# Altium PCB PCB1.PcbDoc
Units mil, origin at the board's own origin, x right, y up, seen from the top; angles counter-clockwise.
Board outline 1735 x 2304 mil, 2 copper layers (Top Layer, Bottom Layer); 26 components, 35 nets, 102 pads, 18 vias.
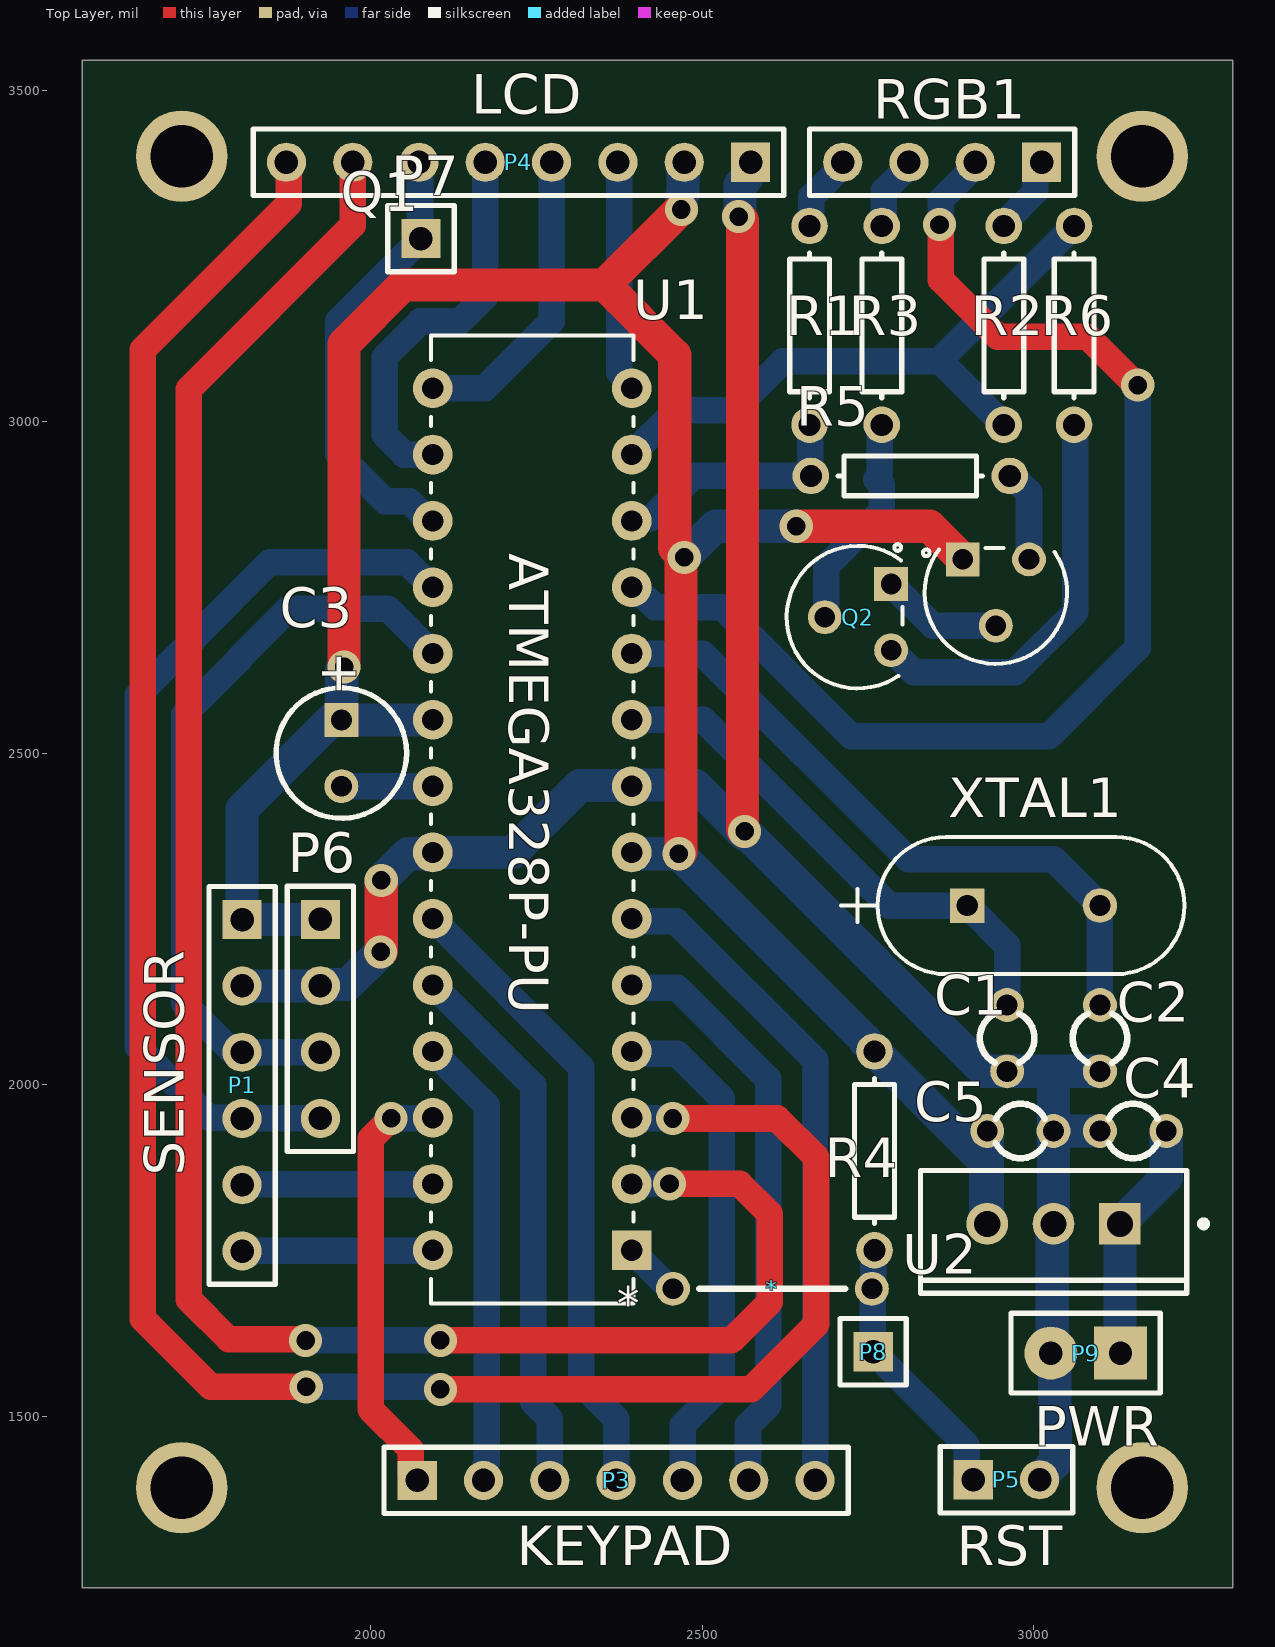
[diagram p0: Top Layer view]
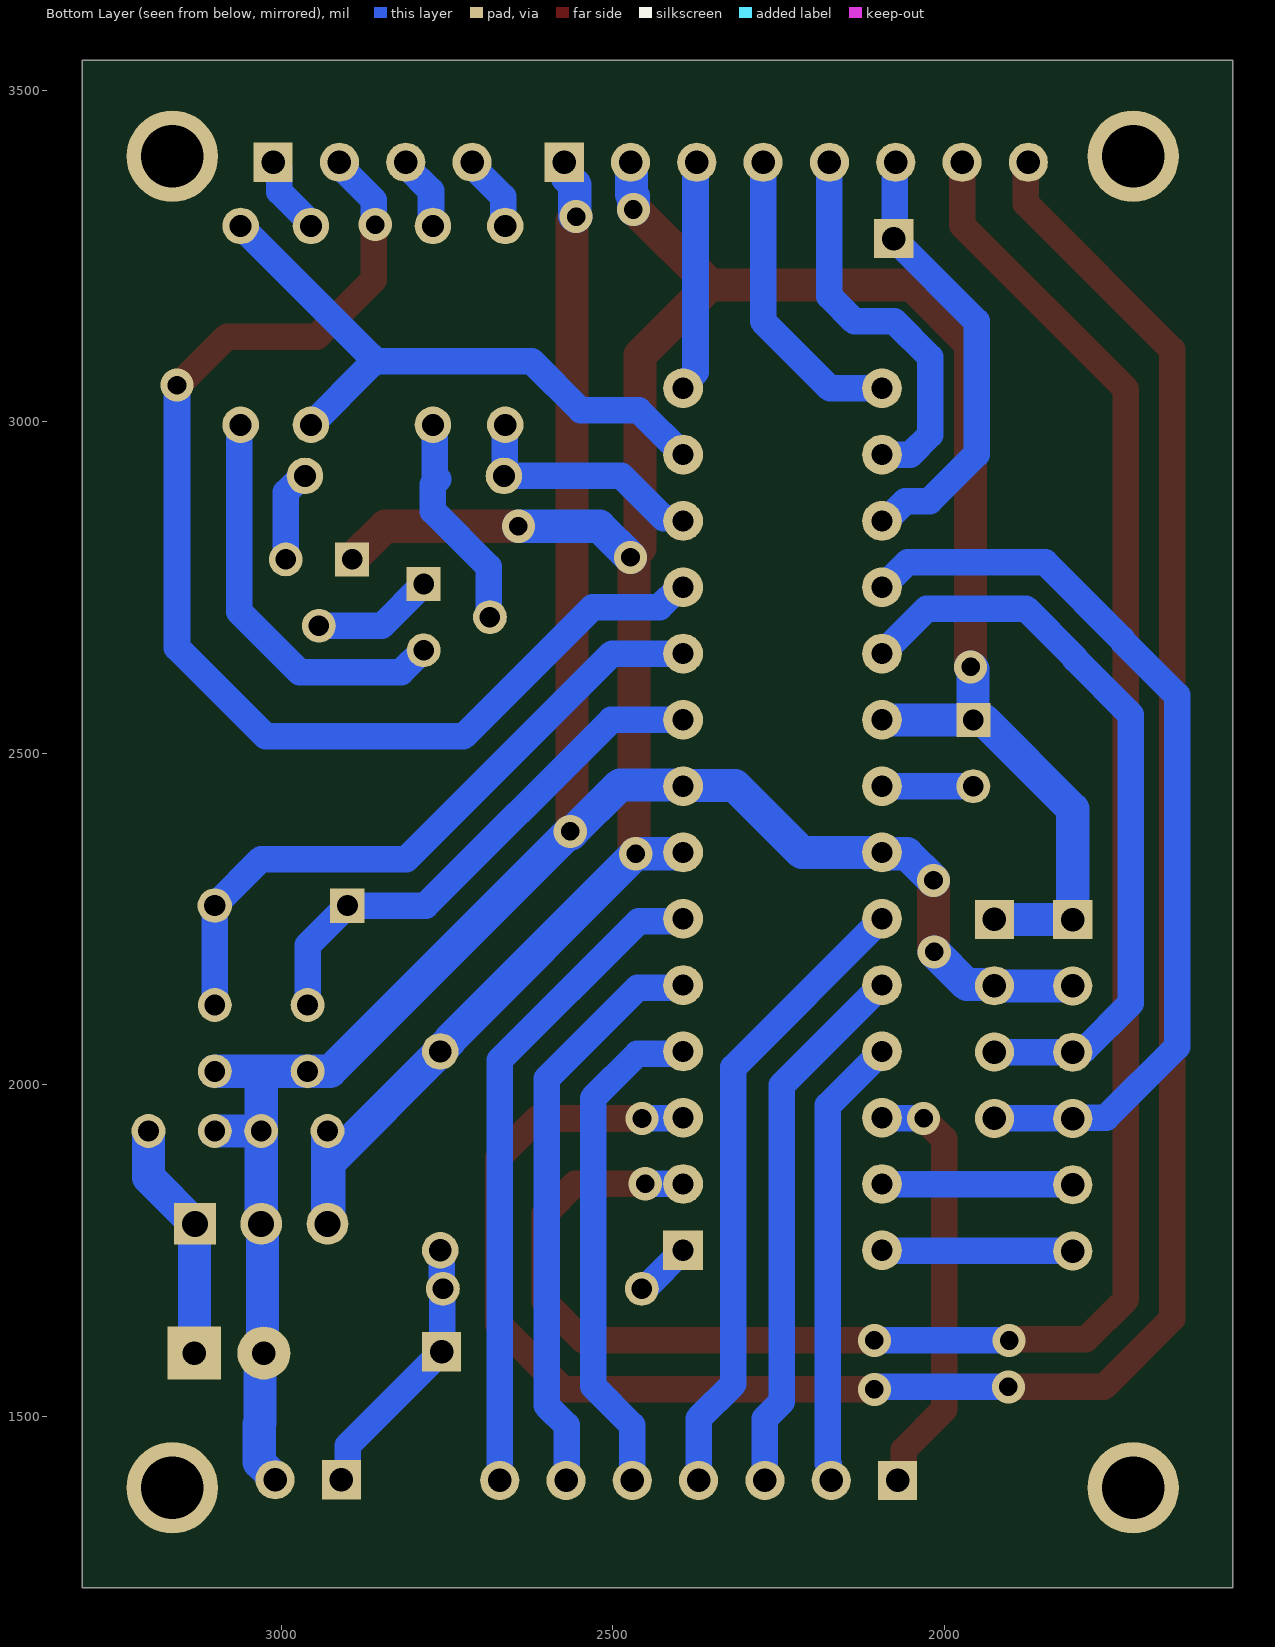
[diagram p1: Bottom Layer view, seen from below]
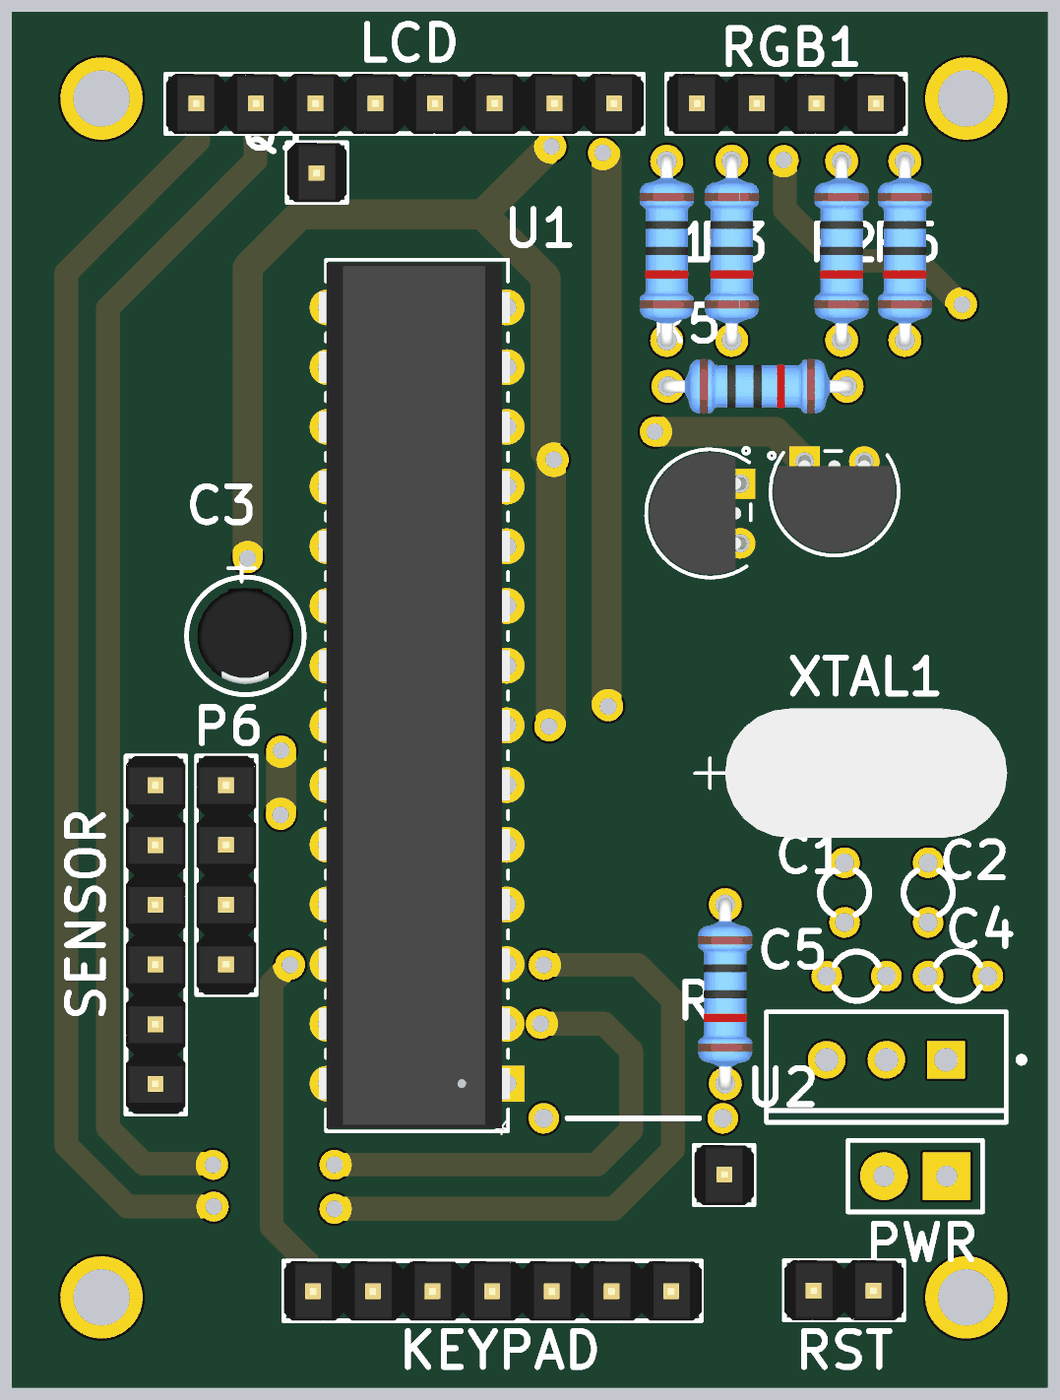
[diagram p2: 3D render of the assembled board from above, using the file's embedded part models]

## Layer stack, top to bottom
Top Solder: solder mask 0.4, Solder Resist, Dk 3.5
Top Layer: signal copper 1.4
Dielectric 1: dielectric 12.6, FR-4, Dk 4.8
Bottom Layer: signal copper 1.4
Bottom Solder: solder mask 0.4, Solder Resist, Dk 3.5

## Board outline
1565,1241 3300,1241 3300,3545 1565,3545

## Design rules (kind name [scope] priority, off if disabled: settings)
Clearance [All] p1: gap=10 ignorepadtopadclearanceinfootprint=FALSE except(0: Arc-Hole Track-Hole SMDPad-Hole THPad-Hole Via-Hole Fill-Hole Poly-Hole Region-Hole Text-Hole; 30: Arc-Arc Arc-Track Arc-Fill Arc-Poly Arc-Region Track-Track Track-Fill Track-Poly Track-Region)
PolygonConnect [All] p1: connectstyle=Relief reliefconductorwidth=10 reliefentries=4 polygonreliefangle="90 Angle" airgapwidth=10
RoutingVias [All] p1: holewidth=28 width=50 viastyle="Through Hole" minholewidth=28 minwidth=50 maxholewidth=28 maxwidth=50
SolderMaskExpansion [All] p1: expansion=4 istentingtop=FALSE
Width Width_POW [InNet('+5')  or InNet('GND') or InNet('VS+')] p1: maxlimit=60 minlimit=30 preferedwidth=50 minimp=50.000000 maximp=50.000000 favimp=50.000000
Width [All] p2: maxlimit=60 minlimit=30 preferedwidth=40 minimp=50.000000 maximp=50.000000 favimp=50.000000
30 further rules are at their usual default settings.

## Components (designator, comment, footprint, x,y, rotation, side; value= is the part's Value field where it differs from the comment)
* "Jumper3" JUMPER3 2606,1692 r180 top
C1 "100pF" CAP3 2960,2070 r270 top
C2 "100pF" CAP3 3100,2070 r270 top
C3 "100pF" CAP1 1956,2500 r270 top
C4 "100pF" CAP3 3150,1930 r180 top
C5 "100pF" CAP3 2980,1930 r0 top
P1 "SENSOR" H6 1806.1,2248.82 r270 top
P3 "KEYPAD" H7 2070.28,1402.91 r0 top
P4 "LCD" H8 2573,3391 r180 top
P5 "RST" H2 2909,1404 r0 top
P6 "ISP1" H4 1924.21,2249.02 r270 top
P7 "ISP2" H1 2076,3276 r0 top
P8 "ISP3" H1 2758,1597 r180 top
P9 "PWR" H2_PWR 3131,1595 r180 top
Q1 "A733" TO-92_ONS 2993,2792 r180 top
Q2 "A733" TO-92_ONS 2785,2655 r90 top
R1 "300R" RES 2662,3145 r90 top
R2 "100R" RES 2955,3145 r90 top
R3 "470R" RES 2771,3145 r90 top
R4 "10K" RES 2760,1900 r90 top value=10k
R5 "100k" RES 2814,2918 r180 top
R6 "100k" RES 3061,3145 r90 top
RGB1 "RGB" H4 3012,3391 r180 top
U1 "ATMEGA328P-PU" 28P3_ATM 2393.74,1750.08 r180 top
U2 "LM7805CT" FAIR-TO-220-3 3030,1790 r270 top
XTAL1 "9B-11.0592MAAJ-B" XTAL 2900,2270 r0 top

## Footprints (in the part's own frame and the unit in brackets; to place one, negate y for a bottom-side part, rotate by r counter-clockwise, add the part's x,y. Pads: shape width x height; smd on the part's side, far side on the other; paste and mask are expansions set on the pad)
28P3_ATM [mil]
  rect 60x60 hole 32 mask+0: 1(0,0)
  round 60 hole 32 mask+0: 2(0,-100) 3(0,-200) 4(0,-300) 5(0,-400) 6(0,-500) 7(0,-600) 8(0,-700) 9(0,-800) 10(0,-900) 11(0,-1000) 12(0,-1100) 13(0,-1200) 14(0,-1300) 15(300,-1300) 16(300,-1200) 17(300,-1100) 18(300,-1000) 19(300,-900) 20(300,-800) 21(300,-700) 22(300,-600) 23(300,-500) 24(300,-400) 25(300,-300) 26(300,-200) 27(300,-100) 28(300,0)
  silkscreen extent -3,-1380 303,80, body extent -5,-1375 314,75, height 205
CAP1 [mm] "THD, 2-Leads, Dia 5mm, Body Length 11mm"
  rect 1.3x1.3 hole 0.8: 1(-1.27,0)
  round 1.3 hole 0.8: 2(1.27,0)
  silkscreen extent -2.5,-2.5 2.5,2.5, body extent -2.05,-2.05 2.05,2.05, height 8.1
CAP3 [mm] "THD, 2-Leads"
  round 1.3 hole 0.8: 1(-1.27,0) 2(1.27,0)
  silkscreen extent -0.94,-1.04 0.94,1.04
FAIR-TO-220-3 [mm] "FM, 3-Leads, Body 10.2x4.7mm, Pitch 2.54mm"
  rect 1.6x1.6 hole 1: 1(0,2.54)
  round 1.6 hole 1: 2(0,0) 3(0,-2.54)
  silkscreen extent -2.04,-5.1 2.66,5.88, body extent -2.04,-5.1 2.66,5.1, height 18.95
H1 [mm] "Connector; Header; 1 Position"
  rect 1.5x1.5 hole 0.9: 1(0,0)
  silkscreen extent -1.27,-1.27 1.27,1.27, body extent -1.27,-1.27 1.27,1.27, height 9.2
H2 [mm] "Connector; Header; 2 Position"
  rect 1.5x1.5 hole 0.9: 1(0,0)
  round 1.5 hole 0.9: 2(2.54,0)
  silkscreen extent -1.27,-1.27 3.81,1.27, body extent -1.27,-1.27 3.81,1.27, height 9.2
H2_PWR [mil] "Connector; Header; 2 Position"
  rect 80x80 hole 35.43: 1(0,0)
  round 80 hole 35.43: 2(105,0)
  silkscreen extent -60,-60 165,60
H4 [mm] "Connector; Header; 4 Position"
  rect 1.5x1.5 hole 0.9: 1(0,0)
  round 1.5 hole 0.9: 2(2.54,0) 3(5.08,0) 4(7.62,0)
  silkscreen extent -1.27,-1.27 8.89,1.27, body extent -1.27,-1.27 8.89,1.27, height 9.2
H6 [mm] "Connector; Header; 6 Position"
  rect 1.5x1.5 hole 0.9: 1(0,0)
  round 1.5 hole 0.9: 2(2.54,0) 3(5.08,0) 4(7.62,0) 5(10.16,0) 6(12.7,0)
  silkscreen extent -1.27,-1.27 13.97,1.27, body extent -1.27,-1.27 13.97,1.27, height 9.2
H7 [mm] "Connector; Header; 7 Position"
  rect 1.5x1.5 hole 0.9: 1(0,0)
  round 1.5 hole 0.9: 2(2.54,0) 3(5.08,0) 4(7.62,0) 5(10.16,0) 6(12.7,0) 7(15.24,0)
  silkscreen extent -1.27,-1.27 16.51,1.27, body extent -1.27,-1.27 16.51,1.27, height 9.2
H8 [mm] "Connector; Header; 8 Position"
  rect 1.5x1.5 hole 0.9: 1(0,0)
  round 1.5 hole 0.9: 2(2.54,0) 3(5.08,0) 4(7.62,0) 5(10.16,0) 6(12.7,0) 7(15.24,0) 8(17.78,0)
  silkscreen extent -1.27,-1.27 19.05,1.27, body extent -1.27,-1.27 19.05,1.27, height 9.2
JUMPER3 [mm]
  round 1.3 hole 0.8: 1(-3.81,0) 2(3.81,0)
  silkscreen extent -2.79,0 2.79,0
RES [mm] "Axial Device, Thru-Hole; 2 Leads; 0.3 in Pin Spacing"
  round 1.4 hole 0.85: 1(-3.81,0) 2(3.81,0)
  silkscreen extent -2.77,-0.76 2.77,0.76, body extent -4.08,-1.17 4.08,1.17, height 2.44
TO-92_ONS [mil]
  rect 51x51 hole 31 mask+0: 1(100,0)
  round 51 hole 31 mask+0: 2(50,100) 3(0,0)
  silkscreen extent -57,-17 160,157, body extent -52,-11 152,153, height 300
XTAL [mil] "Connector; Header; 1 Position"
  rect 52x52 hole 32 mask+0: 1(0,0)
  round 52 hole 32 mask+0: 2(200,0)
  silkscreen extent -190,-104 328,104, body extent -140,-108 332,108, height 145

## Part data
C1 C2 C3 C4 C5: library part Cap1, "Capacitor", PackageDescription="Capacitor; 2 Leads", PackageReference=CAPR5-4X5, Published=23-Sep-2002, Publisher="Altium Limited"
P1: library part "Header 6", "Header, 6-Pin", LatestRevisionDate=17-Jul-2002, LatestRevisionNote="Re-released for DXP Platform.", Publisher="Altium Limited"
P3: library part "Header 7", "Header, 7-Pin", LatestRevisionDate=17-Jul-2002, LatestRevisionNote="Re-released for DXP Platform.", Publisher="Altium Limited"
P4: library part "Header 8", "Header, 8-Pin", LatestRevisionDate=17-Jul-2002, LatestRevisionNote="Re-released for DXP Platform.", Publisher="Altium Limited"
P5 P9: library part "Header 2", "Header, 2-Pin", LatestRevisionDate=17-Jul-2002, LatestRevisionNote="Re-released for DXP Platform.", Publisher="Altium Limited"
P6: library part "Header 4", "Header, 4-Pin", LatestRevisionDate=17-Jul-2002, LatestRevisionNote="Re-released for DXP Platform.", Publisher="Altium Limited"
P7 P8: library part "Header 1", "Header, 1-Pin", LatestRevisionDate=17-Jul-2002, LatestRevisionNote="Re-released for DXP Platform.", Publisher="Altium Limited"
Q1 Q2: "PNP General Purpose Transistor", ComponentLink1Description="Manufacturer Link", ComponentLink1URL=http://www.fairchildsemi.com/, ComponentLink2Description=Datasheet, ComponentLink2URL=http://www.fairchildsemi.com/ds/2N%2F2N3906.pdf, DatasheetVersion=1997, LatestRevisionDate=15-Jan-2003, LatestRevisionNote="PCB Footprint 'BCY-W3/D4.7' replaced", PackageDescription="TO, Flat Index; 3 In-Line, Axial Leads; Body Dia. 4.5mm; Leads 0.51 x 0.48 mm (max)", PackageReference=TO-92A, PackageVersion=Sep-1998, Published=8-Jun-2000, Publisher="Altium Limited"
R1 R2 R3 R4 R5 R6: library part Res1, "Resistor", LatestRevisionDate=17-Jul-2002, LatestRevisionNote="Re-released for DXP Platform.", PackageDescription="Axial Device, Thru-Hole; 2 Leads; 0.3 in Pin Spacing", PackageReference=AXIAL-0.3, Published=8-Jun-2000, Publisher="Altium Limited"
U1 XTAL1: "No Description Available", Copyright="Copyright (C) 2018 Accelerated Designs. All rights reserved", RefDes=RefDes, Type=DEV
  U1: Built_By=EMA_UL_Team, Manufacturer_Part_Number=ATMEGA328P-PU, SourceLibrary=Atmel_2011-04-02, Vendor=Atmel
  XTAL1: Built_By=EMA_Cory, Datasheet=http://www.txccrystal.com/images/pdf/9b.pdf, Manufacturer_Part_Number=9B-11.0592MAAJ-B, SourceLibrary=TXC_2020-02-10, Vendor=TXC
U2: library part CMP-2000-04938-1, "Positive Voltage Regulator, 5 V, 1 A, -40 to 125 degC, 3-Pin TO-220, RoHS, Tube", Manufacturer=FairchildSemiconductor, Maximum Input Voltage=35V, Maximum Output Current=2.2(Typ)A, Maximum Quiescent Current=8mA, Operating Temperature=-40to125degC, Output Voltage=5V, Package=3TO-220AB, Package Description="3-Pin Through Hole Device, Body 10 x 4.5 mm, Pitch 2.54 mm", Package Reference=TO-220, Typical Dropout Voltage @ Current=2@1AV, Accuracy=±4%, Category=LinearRegulator, Datasheet URL=https://datasheet.ciiva.com/26904/lm7805ct-26904988.pdf, Datasheet Version=Aug-12, Line Regulation=100mV, Load Regulation=100mV, Manufacturer URL=https://www.fairchildsemi.com/, Mounting=ThroughHole, Number of Outputs=1, Output Type=Fixed, Package URL=https://www.fairchildsemi.com/package-drawings/TO/TO220B03.pdf, Packaging=Rail/Tube, Polarity=Positive, Rad Hard=No, Type=Linear

## Free pads (board coordinates)
  round 137.8 hole 94.49: ""(1715,1392) ""(1715,3400) ""(3164,1392) ""(3164,3400)

## Via types
v1: diameter 50, hole 28, Top Layer to Bottom Layer, 18 vias

## Nets (pads, with @x,y where several pads share a name; then routed paths per layer and width w, separated by ;. In a path a pad name is that pad's centre, name@x,y a point inside that pad or via, vN(x,y) a via of type N, cw(c..) or ccw(c..) an arc to the next point about the centre after c; other vN are vias at no path point)
+5: C3.1 C5.1 P1.1 P4.2 P6.1 Q1.1 R4.2 U1.7 U1.20 U2.3 | length 4196.8
  Top Layer w50: v1(1960,2630) 1960,3117 2049,3206 2353,3206 ; v1(2464.99,2348.17) 2468,2351.18 2468,2790.08 v1(2473,2795.08) 2458.74,2809.34 2458.74,3100.26 2353,3206 ; v1(2468.74,3319.74) 2466.74,3319.74 2353,3206 ; v1(2642,2842) 2843,2842 Q1.1
  Bottom Layer w50: P6.1 1924.11,2248.92 1806.2,2248.92 P1.1 1806.1,2415.39 1941.3,2550.59 1955.41,2550.59 C3.1 C3.1 ; v1(1960,2630) 1956.59,2626.59 1956.59,2550.59 C3.1 ; U1.20 2093.7,2550.04 C3.1 ; U1.7 2395.65,2348.17 v1(2464.99,2348.17) 2745.28,2067.88 2745.28,2066.11 2760,2051.39 R4.2 2927.51,1882.49 2927.51,1792.49 U2.3 C5.1 ; v1(2468.74,3319.74) 2468.74,3339.74 2471.27,3342.27 2471.27,3389.27 P4.2 ; v1(2473,2795.08) 2519.92,2842 v1(2642,2842)
GND: C1.2 C2.2 C4.2 C5.2 P1.2 P4.1 P5.2 P6.2 P9.2 U1.8 U1.22 U2.2 | length 3383.6
  Top Layer w50: P1.2 P1.2@1807.83,2150.55 ; P6.2 P6.2@1924.86,2148.37 ; v1(2015,2200) 2016,2201 v1(2016,2308) ; v1(2555,3309) 2561,3303 2561,2384.87 v1(2563.98,2381.89)
  Bottom Layer w50: P1.2 1806.2,2148.92 1924.11,2148.92 P6.2 1925.95,2150.75 1965.75,2150.75 v1(2015,2200) ; v1(2016,2308) 2056.17,2348.17 2091.83,2348.17 U1.22 2214.57,2350.08 2315.49,2451 2392.82,2451 U1.8 ; U1.8@2395.65,2451.99 2488.95,2451.99 2492.67,2448.28 v1@2559.06,2381.89 ; v1(2555,3309) 2557,3311 2557,3357.18 2568.47,3368.66 2568.47,3386.47 P4.1 ; v1@2563.98,2376.97 v1(2563.98,2381.89) 2925.87,2020 C1.2 3030,2020 ; P5.2 3009,1406.45 3033,1430.45 3033,1488.53 3031.74,1489.79 3031.74,1589.26 P9.2 3028,1597 3028,1788 U2.2 C5.2 ; C4.2@3099.77,1930.23 C4.2 C5.2 ; C2.2 3030,2020 ; C5.2 3030,2020
Net*_1: *.1 P5.1 P8.1 R4.1 | length 411
  Bottom Layer w40: R4.1 2758,1748 2758,1694 *.1 2757,1691 2757,1598 P8.1 2899.47,1455.53 2899.47,1413.53 P5.1
Net*_2: *.2 U1.1 | length 86.3
  Bottom Layer w40: U1.1 2449.68,1694.14 2453.86,1694.14 *.2
NetC1_1: C1.1 U1.9 XTAL1.1 | length 797.1
  Bottom Layer w40: U1.9 2501.85,2550.08 2781.93,2270 XTAL1.1 2960,2210 C1.1
NetC2_1: C2.1 U1.10 XTAL1.2 | length 1013.7
  Bottom Layer w40: U1.10 2500.85,2650.08 2810.93,2340 3030,2340 XTAL1.2 C2.1
NetC3_2: C3.2 U1.21 | length 137.8
  Bottom Layer w40: C3.2 C3.2 2093.7,2450.04 U1.21
NetP1_3: P1.3 P6.3 U1.19 | length 1150.9
  Top Layer w40: P1.3 P1.3@1806.2,2048.92 ; P6.3@1915.41,2048.92 1915.51,2049.02 P6.3
  Bottom Layer w40: P6.3 1924.11,2048.92 1806.2,2048.92 P1.3 1802.46,2052.46 1788.68,2052.46 1718.62,2122.53 1718.62,2557.96 1802.28,2641.62 1802.28,2643.25 1876.75,2717.72 2026.1,2717.72 U1.19
NetP1_4: P1.4 P6.4 U1.18 | length 1404.2
  Top Layer w40: P1.4 P1.4@1806.2,1948.92 ; P6.4@1915.41,1948.92 1915.51,1949.02 P6.4
  Bottom Layer w40: P6.4 1924.11,1948.92 1806.2,1948.92 P1.4 1804.83,1950.09 1755.61,1950.09 1648.62,2057.09 1648.62,2586.95 1732.28,2670.61 1732.28,2672.24 1847.76,2787.72 2055.1,2787.72 2092.74,2750.08 U1.18
NetP1_5: P1.5 U1.27 | length 288.2
  Bottom Layer w40: P1.5 1806.73,1849.45 2084.5,1849.45 2085.13,1850.08 U1.27
NetP1_6: P1.6 U1.28 | length 288.2
  Bottom Layer w40: P1.6 1806.73,1749.45 2084.5,1749.45 2085.13,1750.08 U1.28
NetP3_1: P3.1 U1.26 | length 651.2
  Top Layer w40: v1(2031,1949) 2000,1918 2000,1510 2060.75,1449.25 2060.75,1412.44 P3.1
  Bottom Layer w40: v1(2031,1949) 2031.54,1949.54 2093.2,1949.54 U1.26
NetP3_2: P3.2 U1.25 | length 682.9
  Bottom Layer w40: U1.25 2175.2,1968.62 2175.2,1428.44 2173.92,1427.17 2173.92,1406.56 P3.2
NetP3_3: P3.3 U1.24 | length 820.3
  Bottom Layer w40: U1.24 2245.2,1998.62 2245.2,1521.38 2270.28,1496.3 P3.3
NetP3_4: P3.4 U1.23 | length 961.7
  Bottom Layer w40: U1.23 2317.91,2025.91 2317.91,1548.66 2370.28,1496.3 P3.4
NetP3_5: P3.5 U1.4 | length 766.2
  Bottom Layer w40: U1.4 2397.57,2046.25 2462.85,2046.25 2529.53,1979.57 2529.53,1545.28 2470.47,1486.22 2470.47,1403.11 P3.5
NetP3_6: P3.6 U1.5 | length 883.1
  Bottom Layer w40: U1.5 2397.57,2146.25 2461.84,2146.25 2599.53,2008.56 2599.53,1516.28 2569.18,1485.94 2569.18,1404.01 P3.6
NetP3_7: P3.7 U1.6 | length 998.8
  Bottom Layer w40: U1.6 2397.57,2246.25 2460.84,2246.25 2670.28,2036.81 P3.7
NetP4_3: P4.3 U1.14 | length 349.5
  Bottom Layer w40: P4.3 2375,3389 2375,3074.23 2393.74,3055.49 U1.14
NetP4_4: P4.4 U1.15 | length 461.1
  Bottom Layer w40: U1.15 2172.08,3050.08 2273,3151 P4.4
NetP4_5: P4.5 U1.16 | length 594.2
  Bottom Layer w40: U1.16 2050.92,2950.08 2021,2980 2021,3097 2075,3151 2135,3151 2173,3189 P4.5
NetP4_6: P4.6 P7.1 U1.17 | length 677.6
  Bottom Layer w40: P4.6 2074.5,3389.5 2074.5,3277.5 P7.1 1951,3151 1951,2951.01 2021.93,2880.08 2058.33,2880.08 2088.33,2850.08 U1.17
NetP4_7: P4.7 U1.2 | length 3103.5
  Top Layer w40: v1(1902,1614) 1900.09,1615.91 1786.09,1615.91 1726,1676 1726,3049 1973,3296 P4.7 ; v1(2105.2,1614.17) 2544.29,1614.17 2602.24,1672.13 2602.24,1804.81 2556.66,1850.39 v1(2450.79,1850.39)
  Bottom Layer w40: v1(1902,1614) 1902.09,1614.09 2105.11,1614.09 v1(2105.2,1614.17) ; U1.2 2393.9,1850.24 2450.63,1850.24 v1(2450.79,1850.39)
NetP4_8: P4.8 U1.3 | length 3492.6
  Top Layer w40: P4.8 1876.65,3387.35 1876.65,3328.65 1656,3108 1656,1647.01 1759.01,1544 v1(1903,1544) ; v1(2105.2,1540.35) 2573.82,1540.35 2672.24,1638.78 2672.24,1889.76 2613.19,1948.82 v1(2455.71,1948.82)
  Bottom Layer w40: v1(1903,1544) 2098.85,1544 2102.49,1540.35 v1(2105.2,1540.35) ; U1.3 2394.37,1949.45 2455.08,1949.45 v1(2455.71,1948.82)
NetQ1_2: Q1.2 Q2.1 | length 184.1
  Bottom Layer w40: Q2.1 2848,2692 Q1.2
NetQ1_3: Q1.3 R5.1 | length 140.6
  Bottom Layer w40: R5.1@2964.11,2917.89 R5.1 2968.09,2918 2993,2893.09 Q1.3
NetQ2_2: Q2.2 R3.1 | length 332.3
  Bottom Layer w40: Q2.2 2687.1,2707.1 2687.1,2781.04 2771,2864.93 2771,2904.93 2762.89,2913.04 2768.11,2918.26 2768.11,2992.11 R3.1
NetQ2_3: Q2.3 R6.1 | length 612.2
  Bottom Layer w40: Q2.3 2786.01,2655 2819.01,2622 2971.99,2622 3063,2713.01 3063,2993 R6.1
NetR1_1: R1.1 R5.2 U1.12 | length 381.6
  Bottom Layer w40: U1.12@2399.15,2850.08 U1.12 2397.57,2853.91 2422.76,2853.91 2486.86,2918 R5.2 2663,2919 2663,2994 R1.1
NetR1_2: R1.2 RGB1.4 | length 126
  Bottom Layer w40: R1.2@2662,3299.09 R1.2 2664.89,3297.89 2664.89,3338.74 2712,3385.84 RGB1.4 RGB1.4@2708.35,3387.35
NetR2_1: R2.1 R6.2 U1.13 | length 947.9
  Bottom Layer w40: U1.13 2460.66,3017 2548.07,3017 2621.63,3090.57 2865,3090.57 ; R2.1 2865,3085 2865,3090.57 ; R6.2 2865,3099 2865,3090.57
NetR2_2: R2.2 RGB1.1 | length 119.6
  Bottom Layer w40: R2.2 2955,3299.09 3002.47,3346.56 3002.47,3381.47 RGB1.1
NetR3_2: R3.2 RGB1.3 | length 113
  Bottom Layer w40: R3.2 2773.89,3297.89 2773.89,3347.74 2812,3385.84 RGB1.3
NetRGB1_2: RGB1.2 U1.11 | length 1871.1
  Top Layer w40: v1(2858,3297) 2859.91,3295.09 2859.91,3214.09 2946,3128 3081.51,3128 3154.51,3055 v1(3157,3055)
  Bottom Layer w40: U1.11 2399.15,2750.08 2429.15,2720.08 2529.84,2720.08 2724.92,2525 3023,2525 3157,2659 v1(3157,3055) ; v1(2858,3297) 2859.91,3298.91 2859.91,3333.76 2912,3385.84 RGB1.2
VS+: C4.1 P9.1 U2.1 | length 364.4
  Bottom Layer w50: P9.1 3130.5,1595.5 3130.5,1789.5 U2.1 3200,1860 C4.1

## Text inside footprints (layer, text, board x,y; h text height)
C3: Top Overlay "+" at 1926.98,2653.86 h59.06 r270
Q1: Mechanical 7 "0.165in/4.191mm" at 3303,2754.5 h25 r180; Mechanical 7 "0.1in/2.54mm" at 3018,2929.75 h25 r180; Mechanical 7 "0.1in/2.54mm" at 2770.5,2754.5 h25 r180; Mechanical 7 "0.205in/5.207mm" at 3036.75,2569.5 h25 r180; Mechanical 7 "Alt 2 Padstyle: OX90Y60D30P" at 3280.5,3267.5 h50 r180; Mechanical 7 "Alt 1 Padstyle: OX60Y90D30P" at 3280.5,3207.5 h50 r180; Mechanical 7 "Pin 1 Padstyle: SX51Y51D31P" at 3280.5,3147.5 h50 r180; Mechanical 7 "Default Padstyle: EX51Y51D31P" at 3305.5,3087.5 h50 r180; Mechanical 7 "Pinout: 1, 2, 3" at 3130.5,3027.5 h50 r180
Q2: Mechanical 7 "0.165in/4.191mm" at 2747.5,2345 h25 r90; Mechanical 7 "0.1in/2.54mm" at 2922.75,2630 h25 r90; Mechanical 7 "0.1in/2.54mm" at 2747.5,2877.5 h25 r90; Mechanical 7 "0.205in/5.207mm" at 2562.5,2611.25 h25 r90; Mechanical 7 "Alt 2 Padstyle: OX90Y60D30P" at 3260.5,2367.5 h50 r90; Mechanical 7 "Alt 1 Padstyle: OX60Y90D30P" at 3200.5,2367.5 h50 r90; Mechanical 7 "Pin 1 Padstyle: SX51Y51D31P" at 3140.5,2367.5 h50 r90; Mechanical 7 "Default Padstyle: EX51Y51D31P" at 3080.5,2342.5 h50 r90; Mechanical 7 "Pinout: 1, 2, 3" at 3020.5,2517.5 h50 r90
U1: Top Overlay "*" at 2406.24,1715.08 h50 r180; Mechanical 7 "1.45in/36.83mm" at 1973.74,2412.58 h25 r180; Mechanical 7 "0.295in/7.493mm" at 2337.49,1630.08 h25 r180; Mechanical 7 "0.3in/7.62mm" at 2318.74,3195.08 h25 r180; Mechanical 7 "0.1in/2.54mm" at 2663.74,1812.58 h25 r180; Mechanical 7 "Alt 2 Padstyle: OX90Y60D30P" at 2581.24,3530.08 h50 r180; Mechanical 7 "Alt 1 Padstyle: OX60Y90D30P" at 2581.24,3480.08 h50 r180; Mechanical 7 "Pin 1 Padstyle: SX60Y60D32P" at 2581.24,3430.08 h50 r180; Mechanical 7 "Default Padstyle: EX60Y60D32P" at 2606.24,3330.08 h50 r180; Mechanical 13 "*" at 2393.74,1775.08 h50 r180
XTAL1: Mechanical 7 "Pin 1 Pad Style: SX52Y52D32P" at 2646.06,1971.5 h50; Mechanical 7 "Default Pad Style: EX52Y52D32P" at 2621.06,1896.5 h50; Mechanical 7 "Alt 1 Pad Style: OX60Y90D30P" at 2646.06,1821.5 h50; Mechanical 7 "Alt 2 Pad Style: OX90Y60D30P" at 2646.06,1746.5 h50; Mechanical 7 "0.197in/5.004mm" at 3292.56,2257.5 h25; Mechanical 7 "200mil" at 2945,2080 h25; Mechanical 7 "0.453in/11.506mm" at 2896.06,2438.5 h25